# EAGLE board Problem 3 (EAGLE 9.7.0)

Size 182.56 x 110.19 mm. Coordinates in mm from the lower left corner, seen from the top.
Outline: 0,0 182.56,0 182.56,110.19 0,110.19 0,0
Copper layers (1*16): Top 0.035mm / dielectric 1.5mm / Bottom 0.035mm
Design rules "default": minimum track width 6mil, minimum drill 0.35mm, track to track 6mil, track to pad 6mil, pad to pad 6mil, via to via 6mil, smd to smd 6mil, copper to edge 40mil, drill to drill 6mil, minimum pad ring 10mil, minimum via ring 8mil, stop-mask expansion 4mil, vias tented up to drill 0mil, thermal gap 10mil

## Footprints (pad centres in the part's own frame; a part is rotated, then mirrored left to right if it is on the bottom)
BATTERY-GENERIC = drill 1.118 pad 3.15 octagon: + 2.54,0; - -2.54,0
MOTOR = drill 1.118 pad 3.15 octagon: + 2.54,0; - -2.54,0
RESAD1016W63L850D250B = drill 0.83 pad 1.43: 1 -5.08,0; 2 5.08,0
SWITCH-MOMENTARY-PTH-6.5MM = drill 1.016 pad 1.88: 1 -3.251,2.261; 2 3.251,2.261; 3 -3.251,-2.261; 4 3.251,-2.261
DIP762W53P254L1969H508Q16B = drill 0.743 pad 1.343: 1 -3.81,8.89; 2 -3.81,6.35; 3 -3.81,3.81; 4 -3.81,1.27; 5 -3.81,-1.27; 6 -3.81,-3.81; 7 -3.81,-6.35; 8 -3.81,-8.89; 9 3.81,-8.89; 10 3.81,-6.35; 11 3.81,-3.81; 12 3.81,-1.27; 13 3.81,1.27; 14 3.81,3.81; 15 3.81,6.35; 16 3.81,8.89
ARDUINO-UNO-R3-SHIELD = drill 1.016 pad 1.88: 3.3V 24.13,-2.54; 5V 24.13,0; A0 24.13,12.7; A1 24.13,15.24; A2 24.13,17.78; A3 24.13,20.32; A4 24.13,22.86; A5 24.13,25.4; AREF -24.13,-13.97; D2 -24.13,20.32; D3 -24.13,17.78; D4 -24.13,15.24; D5 -24.13,12.7; D6 -24.13,10.16; D7 -24.13,7.62; D8 -24.13,3.81; D9 -24.13,1.27; D10 -24.13,-1.27; D11 -24.13,-3.81; D12 -24.13,-6.35; D13 -24.13,-8.89; GND@0 24.13,2.54; GND@1 24.13,5.08; GND@2 -24.13,-11.43; IOREF 24.13,-7.62; NC 24.13,-10.16; RES 24.13,-5.08; RX -24.13,25.4; SCL -24.13,-19.05; SDA -24.13,-16.51; TX -24.13,22.86; VIN 24.13,7.62

## Placement (x,y rotation side)
BAT1  9V  [BATTERY-GENERIC]  108.61,101.93 0 top
M3  MOTOR_HDR  [MOTOR]  171.57,8.26 270 top
MLEFTY  MOTOR_HDR  [MOTOR]  174.3,92.28 270 top
R1  10k  [RESAD1016W63L850D250B]  99.48,33.62 90 top
R2  10k  [RESAD1016W63L850D250B]  109.64,33.62 90 top
R3  10k  [RESAD1016W63L850D250B]  119.8,33.62 90 top
R4  10k  [RESAD1016W63L850D250B]  129.96,33.62 90 top
SBACKWARDS  SWITCH_MOMENTARY  [SWITCH-MOMENTARY-PTH-6.5MM]  112.18,50.13 90 top
SFORWARD  SWITCH_MOMENTARY  [SWITCH-MOMENTARY-PTH-6.5MM]  102.02,50.13 90 top
SLEFT  SWITCH_MOMENTARY  [SWITCH-MOMENTARY-PTH-6.5MM]  132.5,50.13 90 top
SRIGHT  SWITCH_MOMENTARY  [SWITCH-MOMENTARY-PTH-6.5MM]  122.34,50.13 90 top
U1  L293E  [DIP762W53P254L1969H508Q16B]  156.63,50.13 90 top
U2  ARDUINO-UNO-R3-SHIELD  [ARDUINO-UNO-R3-SHIELD]  47.88,49.82 270 top

## Library data of the parts
BAT1 M3 MLEFTY R1-R4 SBACKWARDS SFORWARD SLEFT SRIGHT U1 U2 = Tinkercad

## Nets
BAT1+: BAT1.+ U1.16
BAT1-: BAT1.- R1.1 R2.1 R3.1 R4.1 U1.4 U1.5 U1.12 U1.13 U2.GND@0 U2.GND@1 U2.GND@2
M3_+: M3.+ U1.3
M3_-: M3.- U1.6
MLEFTY_+: MLEFTY.+ U1.14
MLEFTY_-: MLEFTY.- U1.11
U2_5V: SBACKWARDS.3 SBACKWARDS.4 SFORWARD.3 SFORWARD.4 SLEFT.3 SLEFT.4 SRIGHT.3 SRIGHT.4 U1.1 U1.8 U1.9 U2.5V
U2_D2: U1.2 U2.D2
U2_D3: U1.7 U2.D3
U2_D4: U1.10 U2.D4
U2_D5: U1.15 U2.D5
U2_D8: R1.2 SFORWARD.1 SFORWARD.2 U2.D8
U2_D9: R2.2 SBACKWARDS.1 SBACKWARDS.2 U2.D9
U2_D10: R3.2 SRIGHT.1 SRIGHT.2 U2.D10
U2_D11: R4.2 SLEFT.1 SLEFT.2 U2.D11

## Tracks (layer width: path | path; a pad name or v marks a point on that pad's centre or on a via)
BAT1+  (1 unrouted)
BAT1-  (11 unrouted)
M3_+  (1 unrouted)
M3_-  (1 unrouted)
MLEFTY_+  (1 unrouted)
MLEFTY_-  (1 unrouted)
U2_5V  (11 unrouted)
U2_D2  (1 unrouted)
U2_D3  (1 unrouted)
U2_D4  (1 unrouted)
U2_D5  (1 unrouted)
U2_D8  (3 unrouted)
U2_D9  (3 unrouted)
U2_D10  (3 unrouted)
U2_D11  (3 unrouted)